# Allegro board temp_sensor_v1.brd
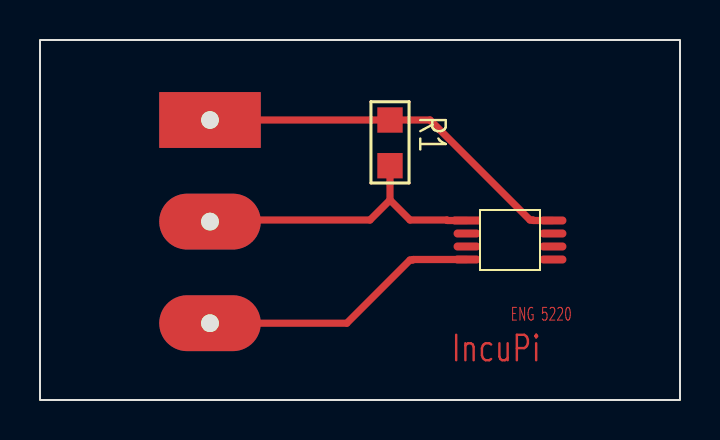
[diagram p0: board, top side]
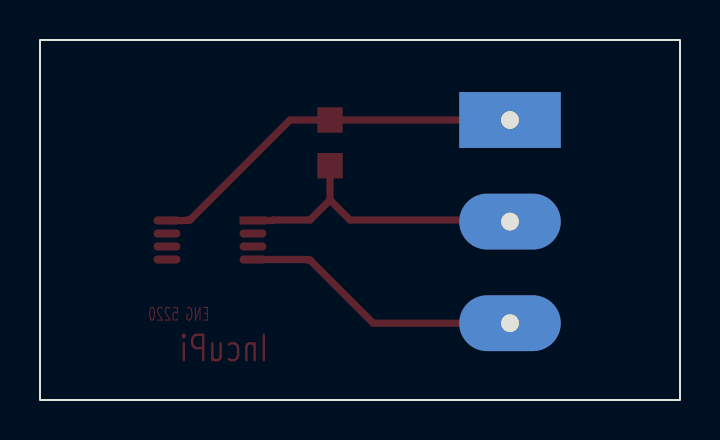
[diagram p1: board, bottom side, seen from below]

Outline 32 x 18 mm; copper layers: TOP, BOTTOM. Coordinates in mm from the lower left corner of the outline.
Outline path: rectangle 0,0 32,18

## Design rules (mm)
constraint set DEFAULT: 

## Placement (name value [footprint] x y rotation side)
J1  CONN FLEX 3  [GU-TERMINAL3-200]  8.5 14 0 top
R1  4K7  [GU-R0805]  17.5 14 270 top
U1  DS18B20  [USOP8]  23.5 8 0 top

## Library data of the parts
J1 = CONN FLEX 3: User Part Number: TERMINAL3-200
R1 = R
U1 = DS18B20_0

## Footprints (pads in the part's own frame, mm; a bottom-side part is the same pattern mirrored in y, then rotated)
GU-R0805
  rect 1.27x1.27 smd: 1(0,0) 2(2.286,0)
GU-TERMINAL3-200
  rect 5.08x2.794 hole 0.889: 1(0,0)
  oval 5.08x2.794 hole 0.889: 2(0,-5.08) 3(0,-10.16)
USOP8
  rect 1.346x0.406 smd: 1(-2.15,0.975)
  oval 1.346x0.406 smd: 2(-2.15,0.325) 3(-2.15,-0.325) 4(-2.15,-0.975) 5(2.15,-0.975) 6(2.15,-0.325) 7(2.15,0.325) 8(2.15,0.975)

## Nets
3V3: J1.1 R1.1 U1.8(VDD)
N00123: J1.2 R1.2 U1.1
N00297: J1.3 U1.4

Pads without a net: U1 2 3 5 6 7

## Routing (per net, layer and track width the routed paths; a pad name or vN(x,y) marks a point on that pad's centre or on a via; arc(x,y) is an arc through that point)
3V3: length 19.2
  TOP w0.36: U1.8 24.67,8.97 24.64,9 24.5,9 19.5,14 R1.1 J1.1
N00123: length 15.4
  TOP w0.36: 17.5,10 16.5,9 8.58,9 J1.2 ; 17.5,10 18.5,9 20.34,9 20.37,8.97 U1.1 ; 17.5,10 R1.2
N00297: length 14.2
  TOP w0.36: U1.4 18.66,7.03 18.63,7 18.5,7 15.34,3.84 J1.3

## Text on the board
TOP: ENG 5220 | IncuPi
